# Altium PCB raspi.PcbDoc
Units mil, origin at the board's own origin, x right, y up, seen from the top; angles counter-clockwise.
Board outline 2300 x 1150 mil, 2 copper layers (Top Layer, Bottom Layer); 12 components, 35 nets, 106 pads, 0 vias.
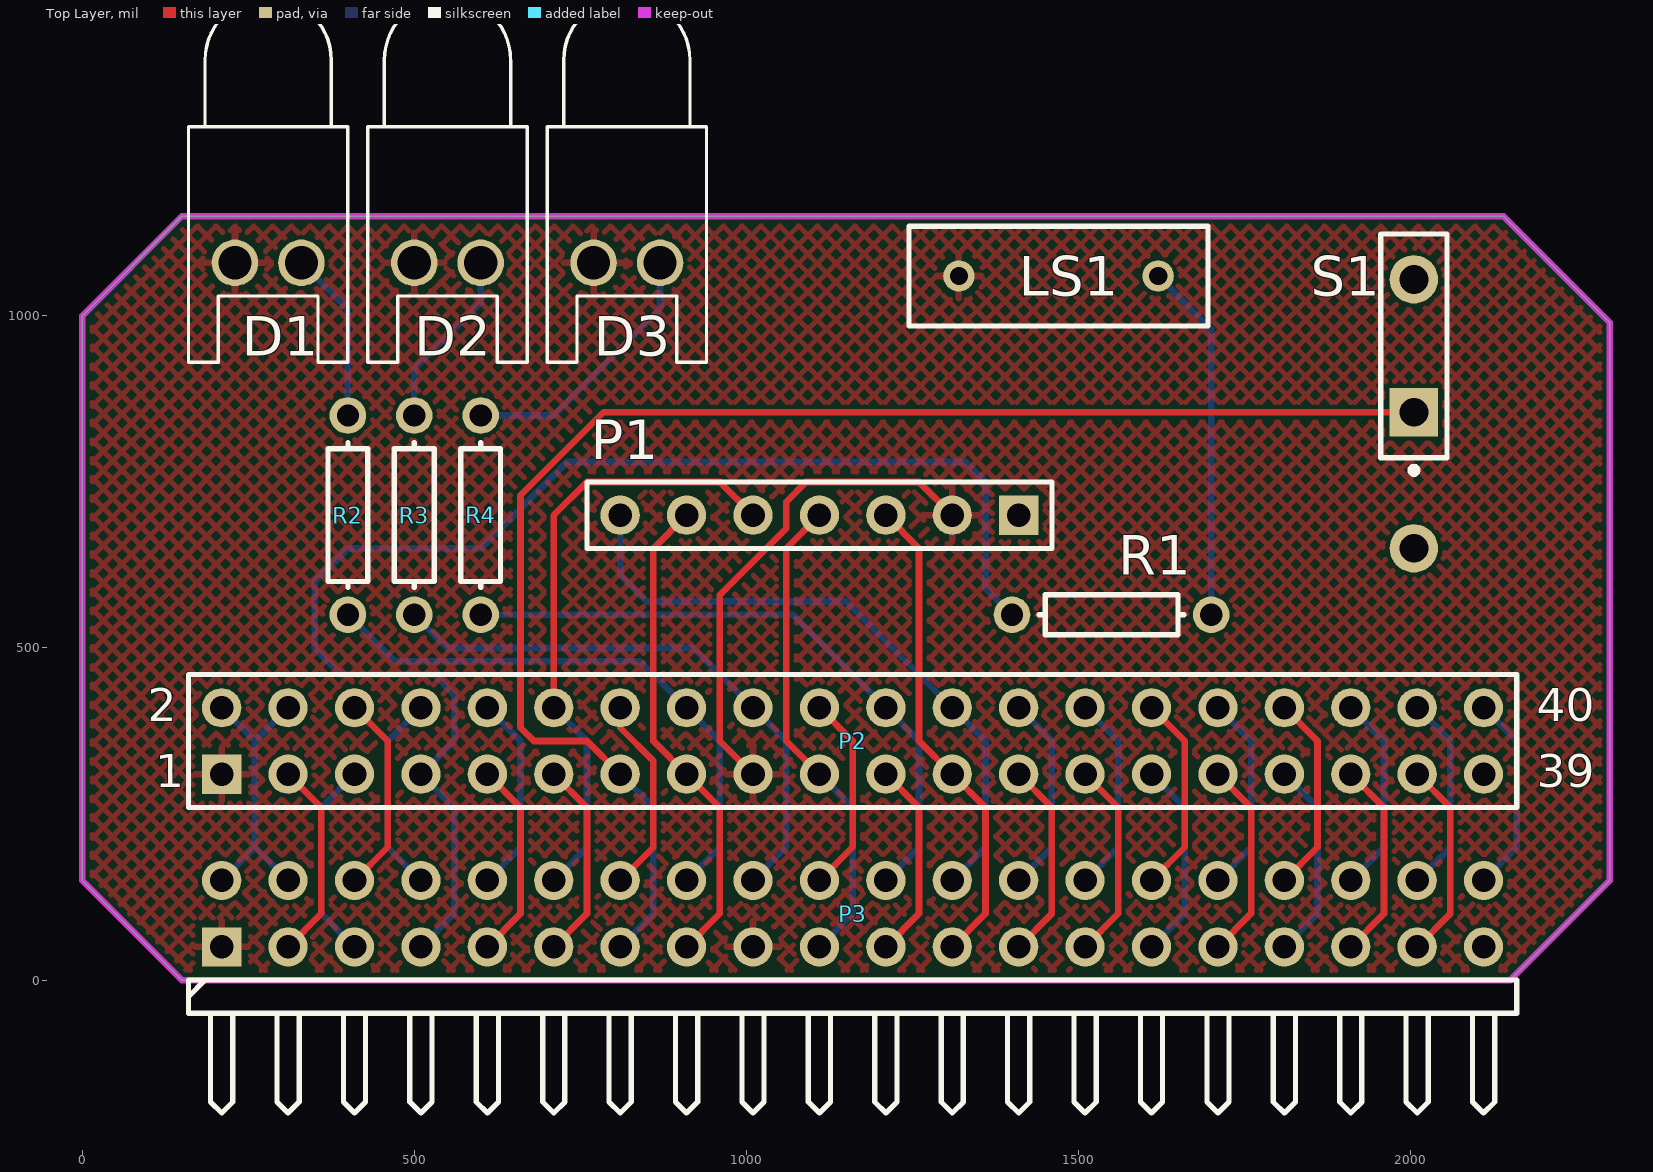
[diagram p0: Top Layer view]
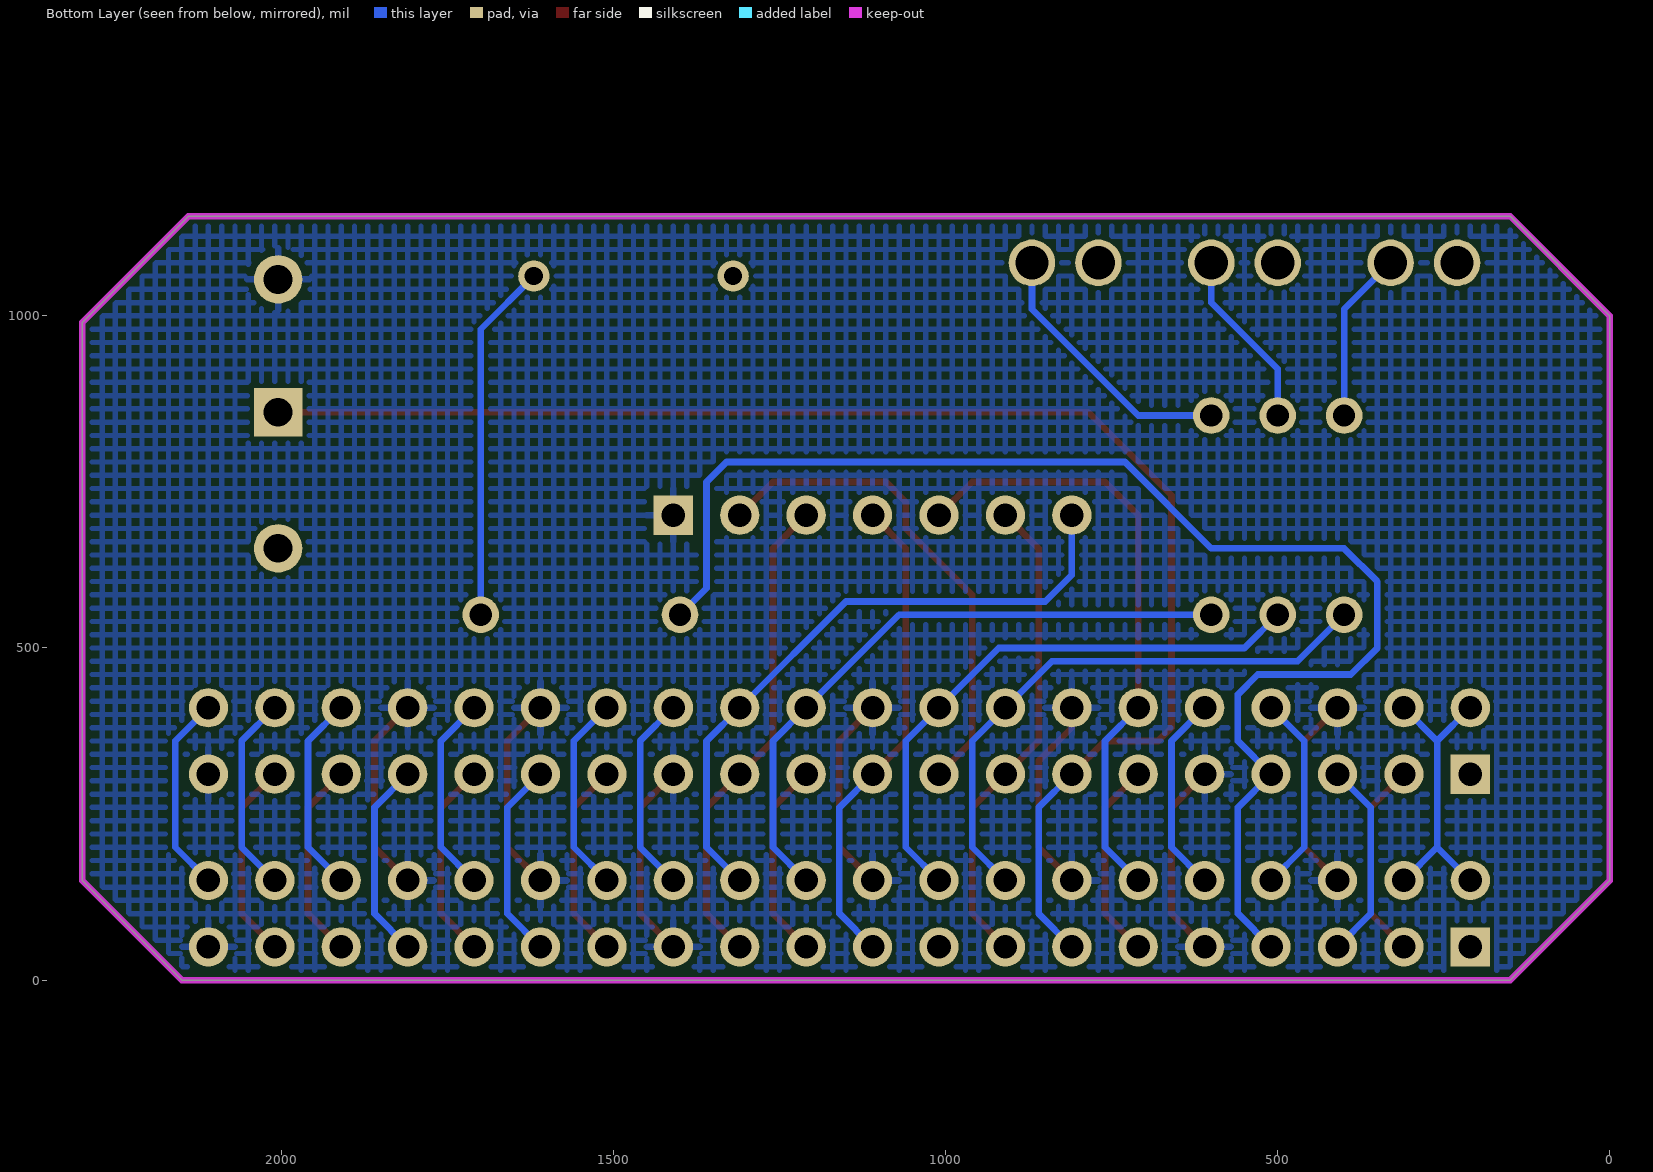
[diagram p1: Bottom Layer view, seen from below]

## Layer stack, top to bottom
Top Solder: solder mask 0.4, Solder Resist, Dk 3.5
Top Layer: signal copper 1.4
Dielectric 1: dielectric 12.6, FR-4, Dk 4.8
Bottom Layer: signal copper 1.4
Bottom Solder: solder mask 0.4, Solder Resist, Dk 3.5

## Board outline
0,150 0,1000 150,1150 2140,1150 2300,990 2300,150 2150,0 150,0

## Design rules (kind name [scope] priority, off if disabled: settings)
Clearance [All] p1: gap=6
PolygonConnect [All] p1: connectstyle=Relief reliefconductorwidth=10 reliefentries=4 polygonreliefangle="90 Angle" airgapwidth=10
RoutingVias [All] p1: holewidth=28 width=50 viastyle="Through Hole" minholewidth=28 minwidth=50 maxholewidth=28 maxwidth=50
SolderMaskExpansion [All] p1: expansion=4
Width [All] p1: maxlimit=24 minlimit=6 preferedwidth=10
30 further rules are at their usual default settings.

## Classes and differential pairs
component class Sheet1: D1 D2 LS1 P1 P2 R1 R2 R3 R4 S1

## Components (designator, comment, footprint, x,y, rotation, side; value= is the part's Value field where it differs from the comment)
D1 "LED0" LED-0 280,1080 r180 top
D2 "LED0" LED-0 550,1080 r180 top
D3 "LED0" LED-0 820,1080 r180 top
LS1 "Speaker" RAD-0.3 1470,1060 r0 top
P1 "Header 7" HDR1X7 1410,700 r180 top
P2 "Header 20X2" HDR2X20 210,310 r0 top
P3 "Header 20X2H" HDR2X20H 210,50 r0 top
R1 "Res1" AXIAL-0.3 1550,550 r180 top
R2 "Res1" AXIAL-0.3 400,700 r270 top
R3 "Res1" AXIAL-0.3 500,700 r270 top
R4 "Res1" AXIAL-0.3 600,700 r270 top
S1 "SW-PB" SPST-2 2005,955 r90 top

## Footprints (in the part's own frame and the unit in brackets; to place one, negate y for a bottom-side part, rotate by r counter-clockwise, add the part's x,y. Pads: shape width x height; smd on the part's side, far side on the other; paste and mask are expansions set on the pad)
AXIAL-0.3 [mm] "Axial Device, Thru-Hole; 2 Leads; 0.3 in Pin Spacing"
  round 1.4 hole 0.85: 1(-3.81,0) 2(3.81,0)
  silkscreen extent -2.77,-0.76 2.77,0.76
HDR1X7 [mm] "Connector; Header; 7 Position"
  rect 1.5x1.5 hole 0.9: 1(0,0)
  round 1.5 hole 0.9: 2(2.54,0) 3(5.08,0) 4(7.62,0) 5(10.16,0) 6(12.7,0) 7(15.24,0)
  silkscreen extent -1.27,-1.27 16.51,1.27
HDR2X20 [mm] "Connector; Header; 20x2 Position"
  rect 1.5x1.5 hole 0.9: 1(0,0)
  round 1.5 hole 0.9: 2(0,2.54) 3(2.54,0) 4(2.54,2.54) 5(5.08,0) 6(5.08,2.54) 7(7.62,0) 8(7.62,2.54) 9(10.16,0) 10(10.16,2.54) 11(12.7,0) 12(12.7,2.54) 13(15.24,0) 14(15.24,2.54) 15(17.78,0) 16(17.78,2.54) 17(20.32,0) 18(20.32,2.54) 19(22.86,0) 20(22.86,2.54) 21(25.4,0) 22(25.4,2.54) 23(27.94,0) 24(27.94,2.54) 25(30.48,0) 26(30.48,2.54) 27(33.02,0) 28(33.02,2.54) 29(35.56,0) 30(35.56,2.54) 31(38.1,0) 32(38.1,2.54) 33(40.64,0) 34(40.64,2.54) 35(43.18,0) 36(43.18,2.54) 37(45.72,0) 38(45.72,2.54) 39(48.26,0) 40(48.26,2.54)
  silkscreen extent -1.27,-1.27 49.53,3.81
HDR2X20H [mm] "Connector; Header; 20x2 Position; Right Angle"
  rect 1.5x1.5 hole 0.9: 1(0,0)
  round 1.5 hole 0.9: 2(0,2.54) 3(2.54,0) 4(2.54,2.54) 5(5.08,0) 6(5.08,2.54) 7(7.62,0) 8(7.62,2.54) 9(10.16,0) 10(10.16,2.54) 11(12.7,0) 12(12.7,2.54) 13(15.24,0) 14(15.24,2.54) 15(17.78,0) 16(17.78,2.54) 17(20.32,0) 18(20.32,2.54) 19(22.86,0) 20(22.86,2.54) 21(25.4,0) 22(25.4,2.54) 23(27.94,0) 24(27.94,2.54) 25(30.48,0) 26(30.48,2.54) 27(33.02,0) 28(33.02,2.54) 29(35.56,0) 30(35.56,2.54) 31(38.1,0) 32(38.1,2.54) 33(40.64,0) 34(40.64,2.54) 35(43.18,0) 36(43.18,2.54) 37(45.72,0) 38(45.72,2.54) 39(48.26,0) 40(48.26,2.54)
  silkscreen extent -1.27,-6.35 49.53,-1.27
LED-0 [mil] "LED; 2 Leads"
  round 70 hole 50: 1(50,0) 2(-50,0)
  silkscreen extent -120,-400 120,150
RAD-0.3 [mm] "Radial Cap, Thru-Hole; 2 Leads; 0.3 in Pin Spacing"
  round 1.2 hole 0.7: 1(-3.81,0) 2(3.81,0)
  silkscreen extent -5.71,-1.91 5.71,1.91
SPST-2 [mm] "Switch; 2 Leads"
  rect 1.85x1.85 hole 1.1: 1(-2.54,0)
  round 1.85 hole 1.1: 2(2.54,0)
  silkscreen extent -4.89,-1.27 4.28,1.27

## Part data
D1 D2 D3: "Typical INFRARED GaAs LED"
LS1: "Loudspeaker"
P1: "Header, 7-Pin"
P2: "Header, 20-Pin, Dual row"
P3: "Header, 20-Pin, Dual row, Right Angle"
R1 R2 R3 R4: "Resistor"
S1: "Switch"

## Free pads (board coordinates)
  round 72.83 hole 43.31: 1(2005,650)

## Nets (pads, with @x,y where several pads share a name; then routed paths per layer and width w, separated by ;. In a path a pad name is that pad's centre, name@x,y a point inside that pad or via, vN(x,y) a via of type N, cw(c..) or ccw(c..) an arc to the next point about the centre after c; other vN are vias at no path point)
3V3: D1.1 D2.1 D3.1 LS1.1 P1.2 P2.1 P2.17 P3.1 P3.17 | length 755.3
  Top Layer w10: P2.17 960,360 960,580 1060,680 1060,720 1090,750 1260,750 P1.2
5V: P2.2 P2.4 P3.2 P3.4 | length 442.8
  Bottom Layer w10: P3.2 260,200 ; P2.2 260,360 ; P3.4 260,200 ; P2.4 260,360 ; 260,200 260,360
CE0: P1.7 P2.24 P3.24 | length 974.3
  Bottom Layer w10: P1.7 810,610 850,570 1150,570 P2.24 1360,360 1360,200 P3.24
CE1: P2.26 P3.26 | length 301.4
  Bottom Layer w10: P3.26 1460,200 1460,360 P2.26
GND: P1.1 P2.6 P2.9 P2.14 P2.20 P2.25 P2.30 P2.34 P2.39 P3.6 P3.9 P3.14 P3.20 P3.25 P3.30 P3.34 P3.39 S1.2 | length 2109.9
  Top Layer w10: P3.6 460,200 460,360 P2.6 ; P3.9 660,100 660,260 P2.9 ; P3.14 860,200 860,330 810,380 P2.14 ; P3.20 1160,200 1160,360 P2.20 ; P3.25 1460,100 1460,260 P2.25 ; P3.30 1660,200 1660,360 P2.30 ; P3.34 1860,200 1860,360 P2.34
GPIO.0: P2.11 P3.11 | length 301.4
  Top Layer w10: P3.11 760,100 760,260 P2.11
GPIO.1: P1.5 P2.12 P3.12 | length 932.8
  Top Layer w10: P2.12 710,700 760,750 960,750 P1.5
  Bottom Layer w10: P3.12 760,200 760,360 P2.12
GPIO.2: P2.13 P3.13 S1.1 | length 2227.2
  Top Layer w10: P2.13 760,360 680,360 660,380 660,730 785,855 S1.1
  Bottom Layer w10: P3.13 860,100 860,260 P2.13
GPIO.3: P1.6 P2.15 P3.15 | length 732.8
  Top Layer w10: P3.15 960,100 960,260 P2.15 860,360 860,650 P1.6
GPIO.4: P2.16 P3.16 R2.2 | length 869.4
  Bottom Layer w10: R2.2 470,480 840,480 P2.16 960,360 960,200 P3.16
GPIO.5: P2.18 P3.18 R3.2 | length 869.4
  Bottom Layer w10: R3.2 550,500 920,500 P2.18 1060,360 1060,200 P3.18
GPIO.6: P2.22 P3.22 R4.2 | length 969.4
  Bottom Layer w10: R4.2 1070,550 P2.22 1260,360 1260,200 P3.22
GPIO.7: P2.7 P3.7 R1.2 | length 2094.7
  Bottom Layer w10: P3.7 560,100 560,260 P2.7 560,360 560,430 530,460 390,460 350,500 350,600 400,650 600,650 730,780 1330,780 1360,750 1360,590 R1.2
GPIO.21: P2.29 P3.29 | length 301.4
  Bottom Layer w10: P3.29 1660,100 1660,260 P2.29
GPIO.22: P2.31 P3.31 | length 301.4
  Top Layer w10: P3.31 1760,100 1760,260 P2.31
GPIO.23: P2.33 P3.33 | length 301.4
  Bottom Layer w10: P3.33 1860,100 1860,260 P2.33
GPIO.24: P2.35 P3.35 | length 301.4
  Top Layer w10: P3.35 1960,100 1960,260 P2.35
GPIO.25: P2.37 P3.37 | length 301.4
  Top Layer w10: P3.37 2060,100 2060,260 P2.37
GPIO.26: P2.32 P3.32 | length 301.4
  Bottom Layer w10: P3.32 1760,200 1760,360 P2.32
GPIO.27: P2.36 P3.36 | length 301.4
  Bottom Layer w10: P3.36 1960,200 1960,360 P2.36
GPIO.28: P2.38 P3.38 | length 301.4
  Bottom Layer w10: P3.38 2060,200 2060,360 P2.38
GPIO.29: P2.40 P3.40 | length 301.4
  Bottom Layer w10: P3.40 2160,200 2160,360 P2.40
MISO: P2.21 P3.21 | length 301.4
  Top Layer w10: P3.21 1260,100 1260,260 P2.21
MOSI: P1.4 P2.19 P3.19 | length 732.8
  Top Layer w10: P2.19 1060,360 1060,650 P1.4
  Bottom Layer w10: P3.19 1160,100 1160,260 P2.19
NetD1_2: D1.2 R2.1 | length 259
  Bottom Layer w10: D1.2 400,1010 R2.1
NetD2_2: D2.2 R3.1 | length 271.4
  Bottom Layer w10: R3.1 500,920 600,1020 D2.2
NetD3_2: D3.2 R4.1 | length 406.3
  Bottom Layer w10: R4.1 710,850 870,1010 D3.2
NetLS1_2: LS1.2 R1.1 | length 543.1
  Bottom Layer w10: LS1.2 1700,980 R1.1
RXD: P2.10 P3.10 | length 301.4
  Bottom Layer w10: P3.10 660,200 660,360 P2.10
SCL0: P2.28 P3.28 | length 301.4
  Bottom Layer w10: P3.28 1560,200 1560,360 P2.28
SCL1: P2.5 P3.5 | length 301.4
  Bottom Layer w10: P3.5 360,100 360,260 P2.5
SCLK: P1.3 P2.23 P3.23 | length 732.8
  Top Layer w10: P1.3 1260,650 1260,360 P2.23 1360,260 1360,100 P3.23
SDA0: P2.27 P3.27 | length 301.4
  Top Layer w10: P3.27 1560,100 1560,260 P2.27
SDA1: P2.3 P3.3 | length 301.4
  Top Layer w10: P3.3 360,100 360,260 P2.3
TXD: P2.8 P3.8 | length 301.4
  Bottom Layer w10: P3.8 460,200 460,360 P2.8

## Polygon pours and split planes (outlines as drawn)
3V3 on Top Layer "Top Layer-No Net" (hatched 45Degree grid 20 track 8, pour order 4): 0,150 0,1000 150,1150 2140,1150 2300,990 2300,150 2150,0 150,0
GND on Bottom Layer "Top Layer-No Net1" (hatched 90Degree grid 20 track 8, pour order 6): 0,150 0,1000 150,1150 2140,1150 2300,990 2300,150 2150,0 150,0

## Keep-outs
Keep-Out Layer:
  the board outline again, w10

## Dimensions
2140,1150 to 2150,0 on Top Overlay
0,1000 to 2300,990 on Top Overlay

## Text inside footprints (layer, text, board x,y; h text height)
P2: Top Overlay "39" at 2190,290 h50; Top Overlay "40" at 2190,390 h50; Top Overlay "2" at 98.62,390 h50; Top Overlay "1" at 110,290 h50